# Altium PCB twentyfour.PcbDoc
Units mm, origin at the board's own origin, x right, y up, seen from the top; angles counter-clockwise.
Board outline 54.2 x 35 mm, 2 copper layers (Top Layer, Bottom Layer); 2 components, 24 nets, 48 pads, 0 vias.
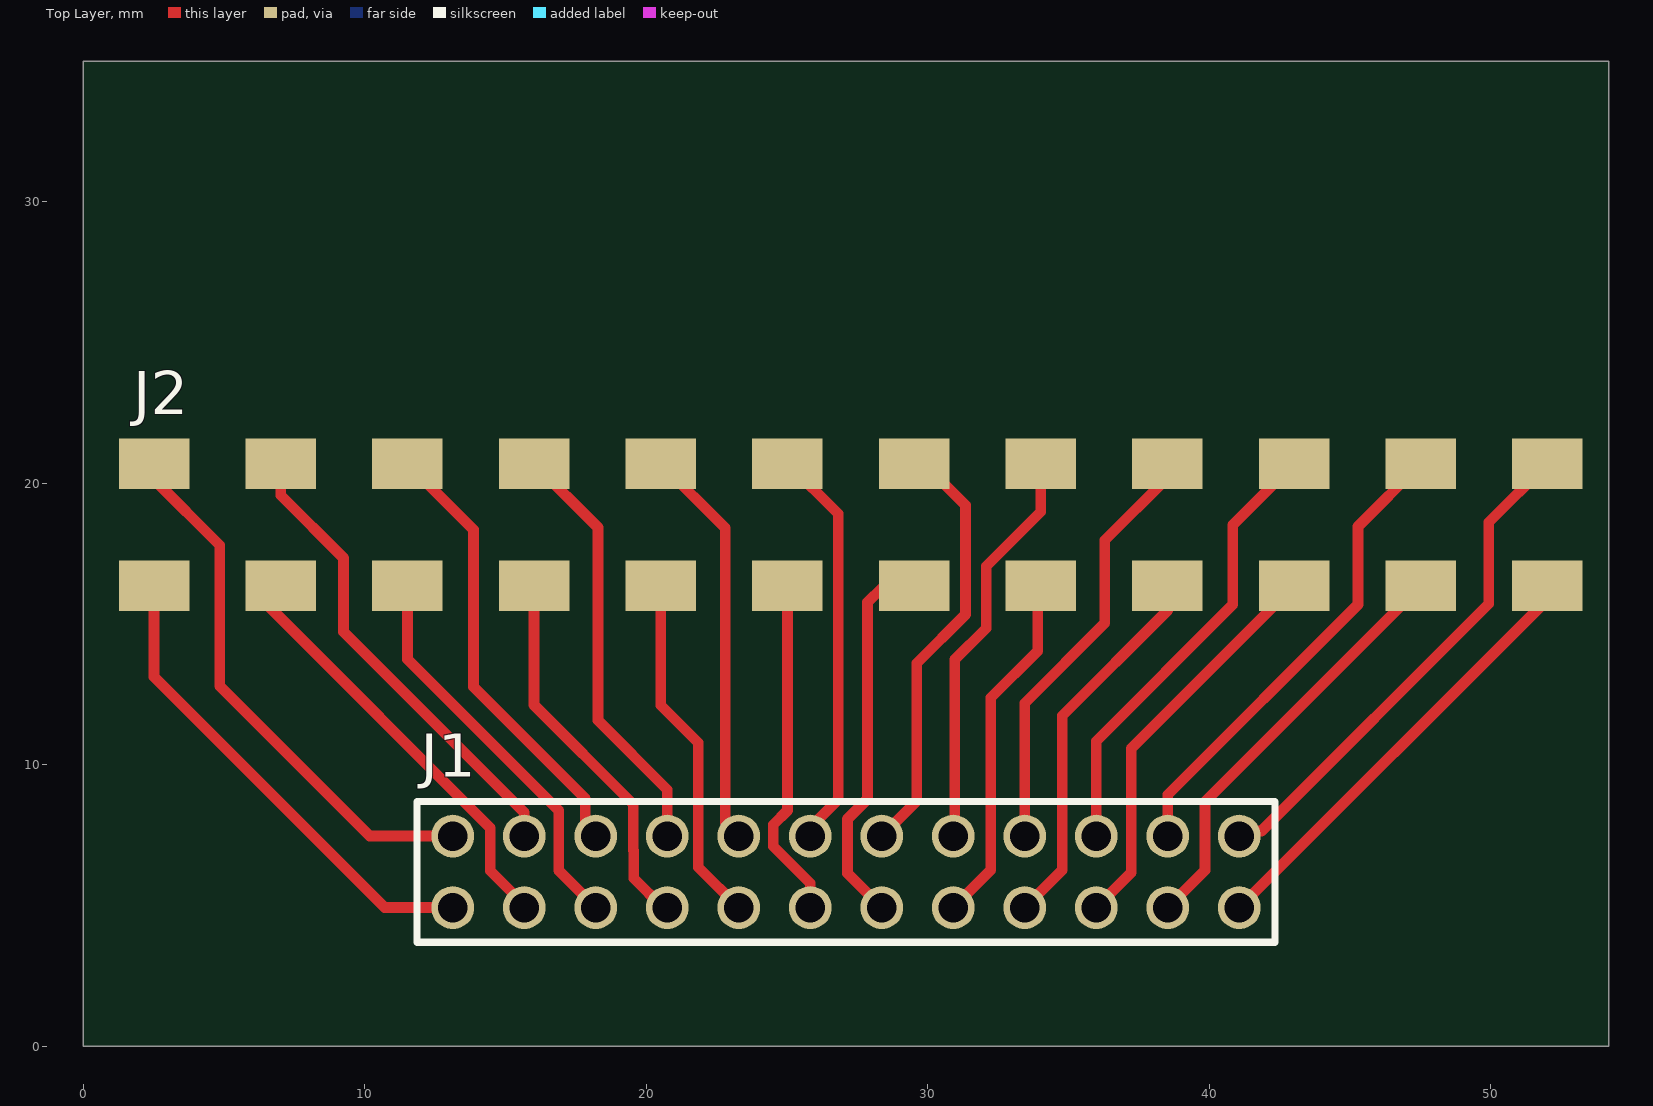
[diagram p0: Top Layer view]
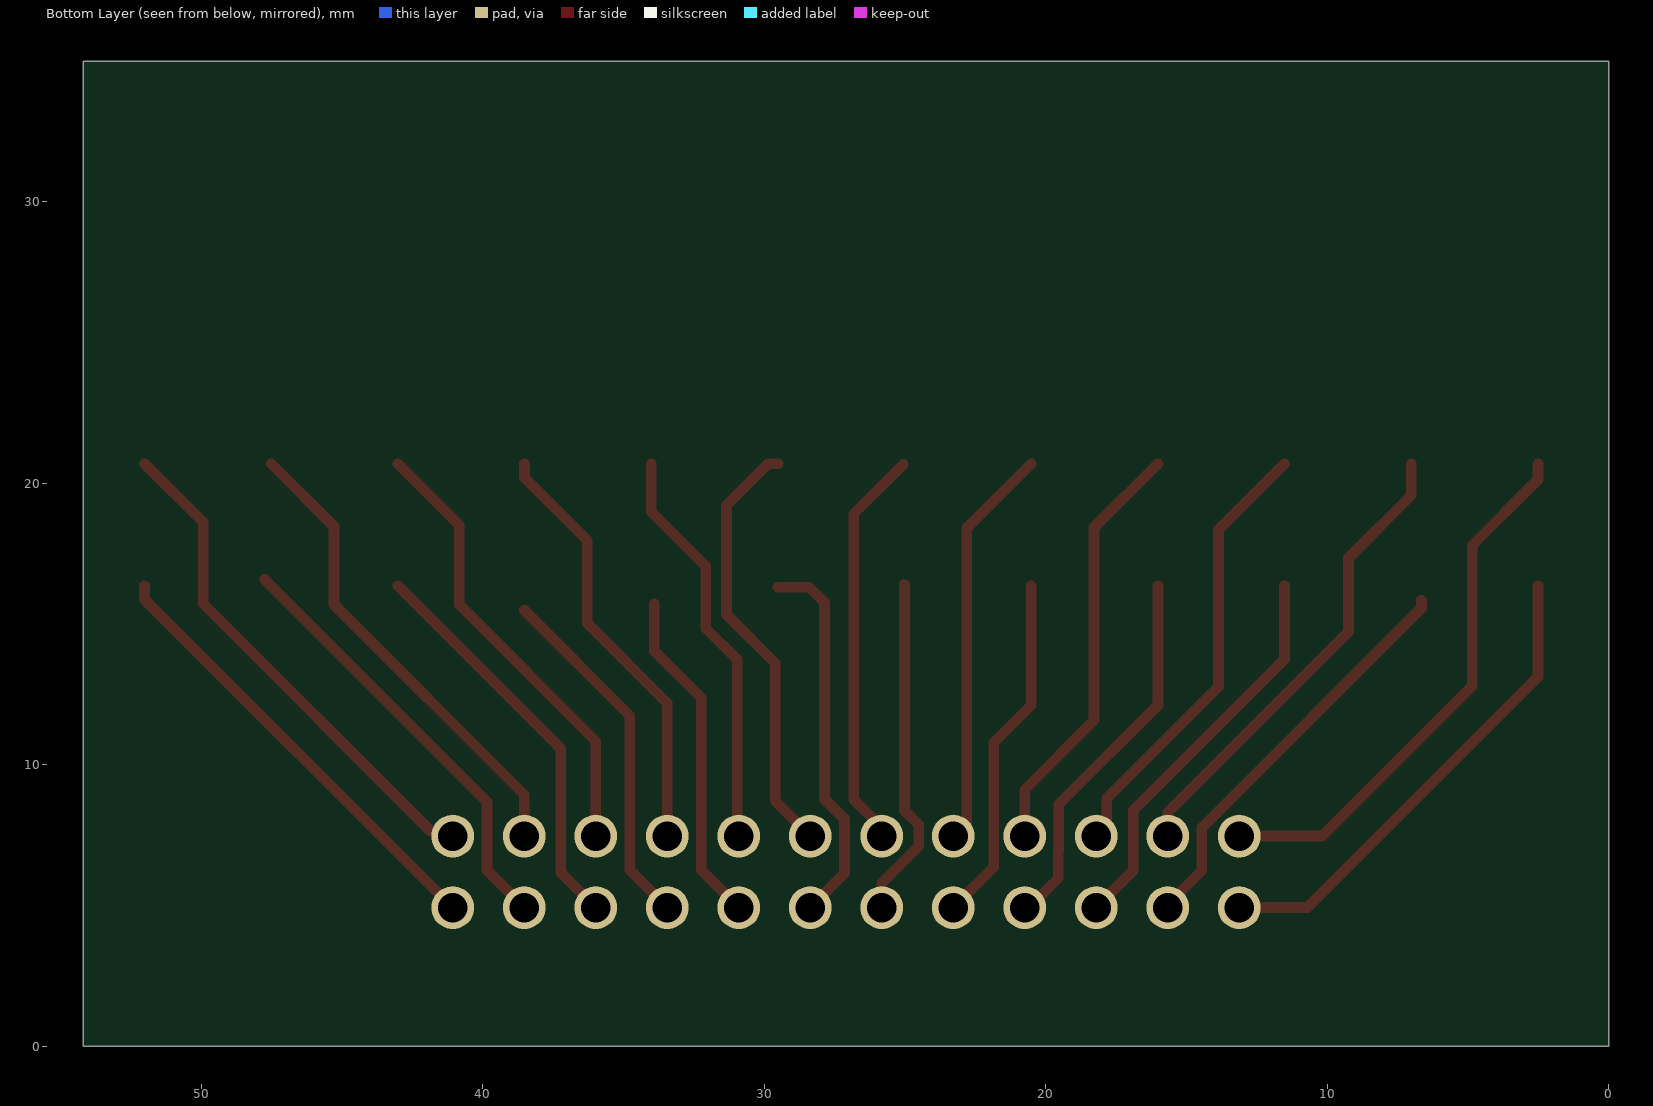
[diagram p1: Bottom Layer view, seen from below]

## Layer stack, top to bottom
Top Solder: solder mask 0.0102, Solder Resist, Dk 3.5
Top Layer: signal copper 0.0356
Dielectric 1: dielectric 0.32, FR-4, Dk 4.8
Bottom Layer: signal copper 0.0356
Bottom Solder: solder mask 0.0102, Solder Resist, Dk 3.5

## Board outline
0,0 54.2,0 54.2,35 0,35

## Design rules (kind name [scope] priority, off if disabled: settings)
Clearance [All] p1: gap=0.152 ignorepadtopadclearanceinfootprint=FALSE
PolygonConnect [All] p1: connectstyle=Relief reliefconductorwidth=0.254 reliefentries=4 polygonreliefangle="90 Angle" airgapwidth=0.254
RoutingVias [All] p1: holewidth=0.711 width=1.27 viastyle="Through Hole" minholewidth=0.711 minwidth=1.27 maxholewidth=0.711 maxwidth=1.27
SolderMaskExpansion [All] p1: expansion=0.102
Width [All] p1: maxlimit=0.508 minlimit=0.254 preferedwidth=0.381 minimp=50.000000 maximp=50.000000 favimp=50.000000
30 further rules are at their usual default settings.

## Classes and differential pairs
component class twentyfour: J1

## Components (designator, comment, footprint, x,y, rotation, side; value= is the part's Value field where it differs from the comment)
J1 "wanzhen" wanzhen 11.86,3.7 r0 top
J2 "hanpan" hanpan 2.519,20.702 r0 top

## Footprints (in the part's own frame and the unit in brackets; to place one, negate y for a bottom-side part, rotate by r counter-clockwise, add the part's x,y. Pads: shape width x height; smd on the part's side, far side on the other; paste and mask are expansions set on the pad)
hanpan [mm]
  rect 2.5x1.8 smd: 1(0,0) 2(0,-4.34) 3(4.5,0) 4(4.5,-4.34) 5(9,0) 6(9,-4.34) 7(13.5,0) 8(13.5,-4.34) 9(18,0) 10(18,-4.34) 11(22.5,0) 12(22.5,-4.34) 13(27,0) 14(27,-4.34) 15(31.5,0) 16(31.5,-4.34) 17(36,0) 18(36,-4.34) 19(40.5,0) 20(40.5,-4.34) 21(45,0) 22(45,-4.34) 23(49.5,0) 24(49.5,-4.34)
wanzhen [mm]
  round 1.524 hole 1.05: 1(1.27,3.77) 2(1.27,1.23) 3(3.81,3.77) 4(3.81,1.23) 5(6.35,3.77) 6(6.35,1.23) 7(8.89,3.77) 8(8.89,1.23) 9(11.43,3.77) 10(11.43,1.23) 11(13.97,3.77) 12(13.97,1.23) 13(16.51,3.77) 14(16.51,1.23) 15(19.05,3.77) 16(19.05,1.23) 17(21.59,3.77) 18(21.59,1.23) 19(24.13,3.77) 20(24.13,1.23) 21(26.67,3.77) 22(26.67,1.23) 23(29.21,3.77) 24(29.21,1.23)
  silkscreen extent 0,0 30.48,5

## Part data
J1: "弯针"
J2: "焊盘"

## Nets (pads, with @x,y where several pads share a name; then routed paths per layer and width w, separated by ;. In a path a pad name is that pad's centre, name@x,y a point inside that pad or via, vN(x,y) a via of type N, cw(c..) or ccw(c..) an arc to the next point about the centre after c; other vN are vias at no path point)
P1: J1.1 J2.1 | length 19.4
  Top Layer w0.381: J2.1 2.519,20.138 4.851,17.805 4.851,12.802 10.183,7.47 J1.1
P2: J1.2 J2.2 | length 17.2
  Top Layer w0.381: J2.2 2.519,13.127 10.716,4.93 J1.2
P3: J1.3 J2.3 | length 16.8
  Top Layer w0.381: J2.3 7.019,19.575 9.246,17.348 9.246,14.732 15.67,8.308 J1.3
P4: J1.4 J2.4 | length 14.7
  Top Layer w0.381: J2.4@6.655,15.85 6.655,15.57 14.463,7.762 14.463,6.238 15.67,5.031 J1.4
P5: J1.5 J2.5 | length 16
  Top Layer w0.381: J2.5 13.868,18.353 13.868,12.776 17.837,8.808 17.837,7.843 J1.5
P6: J1.6 J2.6 | length 14.2
  Top Layer w0.381: J2.6 11.519,13.754 16.891,8.382 16.891,6.249 J1.6
P7: J1.7 J2.7 | length 15.2
  Top Layer w0.381: J2.7 18.288,18.433 18.288,11.582 20.75,9.12 J1.7
P8: J1.8 J2.8 | length 13.5
  Top Layer w0.381: J2.8 16.019,12.124 19.543,8.6 19.543,6.97 19.558,6.956 19.558,5.969 20.597,4.93 J1.8
P9: J1.9 J2.9 | length 14.4
  Top Layer w0.381: J2.9 22.809,18.412 22.809,7.951 J1.9
P10: J1.10 J2.10 | length 12.6
  Top Layer w0.381: J2.10 20.519,12.12 21.855,10.784 21.855,6.365 J1.10
P11: J1.11 J2.11 | length 14.3
  Top Layer w0.381: J2.11@25.07,20.676 26.822,18.923 26.822,8.772 25.83,7.779 J1.11
P12: J1.12 J2.12 | length 12.2
  Top Layer w0.381: J2.12@25.019,16.408 J2.12 25.019,8.382 24.511,7.874 24.511,7.112 25.83,5.793 J1.12
P13: J1.13 J2.13 | length 15.4
  Top Layer w0.381: J1.13 29.616,8.716 29.616,13.614 31.344,15.342 31.344,19.227 29.869,20.702 J2.13
P14: J1.14 J2.14 | length 13.5
  Top Layer w0.381: J1.14 27.153,6.147 27.153,8.077 27.864,8.788 27.864,15.773 28.401,16.311 J2.14@29.519,16.311
P15: J1.15 J2.15 | length 14.5
  Top Layer w0.381: J1.15 30.963,7.523 30.963,13.741 32.08,14.859 32.08,17.058 34.019,18.997 J2.15
P16: J1.16 J2.16 | length 12
  Top Layer w0.381: J1.16 32.243,6.264 32.243,12.381 33.909,14.046 J2.16@33.909,15.723
P17: J1.17 J2.17 | length 15.3
  Top Layer w0.381: J1.17 33.45,12.19 36.297,15.037 36.297,17.983 38.519,20.206 J2.17
P18: J1.18 J2.18 | length 12.7
  Top Layer w0.381: J1.18 34.783,6.264 34.783,11.746 J2.18@38.519,15.481
P19: J1.19 J2.19 | length 16.1
  Top Layer w0.381: J1.19 35.99,10.844 40.843,15.697 40.843,18.526 J2.19
P20: J1.20 J2.20 | length 14.6
  Top Layer w0.381: J1.20@36.087,5.176 35.99,5.078 J1.20 37.236,6.176 37.236,10.579 J2.20
P21: J1.21 J2.21 | length 17
  Top Layer w0.381: J1.21 38.53,8.939 45.288,15.697 45.288,18.471 J2.21
P22: J1.22 J2.22 | length 15.5
  Top Layer w0.381: J1.22 39.853,6.253 39.853,8.687 J2.22@47.752,16.586
P23: J1.23 J2.23 | length 18.1
  Top Layer w0.381: J1.23 41.25,7.65 41.863,7.65 49.936,15.723 49.936,18.619 J2.23
P24: J1.24 J2.24 | length 16
  Top Layer w0.381: J1.24 52.019,15.879 J2.24

## Silkscreen, mask and mechanical layers (free items; w line width, h text height)
Mechanical 1:
  circle w0.254: c27.1,28 r1.5
  circle w0.254: c2.4,28 r1.5
  circle w0.254: c51.8,28 r1.5
  lines w0.254: 0,0 0,35 54.2,35 54.2,0 0,0